# Altium PCB PCB1_1.PcbDoc
Units mil, origin at the board's own origin, x right, y up, seen from the top; angles counter-clockwise.
Board outline 6000 x 4000 mil, 2 copper layers (Top Layer, Bottom Layer); 23 components, 40 nets, 148 pads, 0 vias.
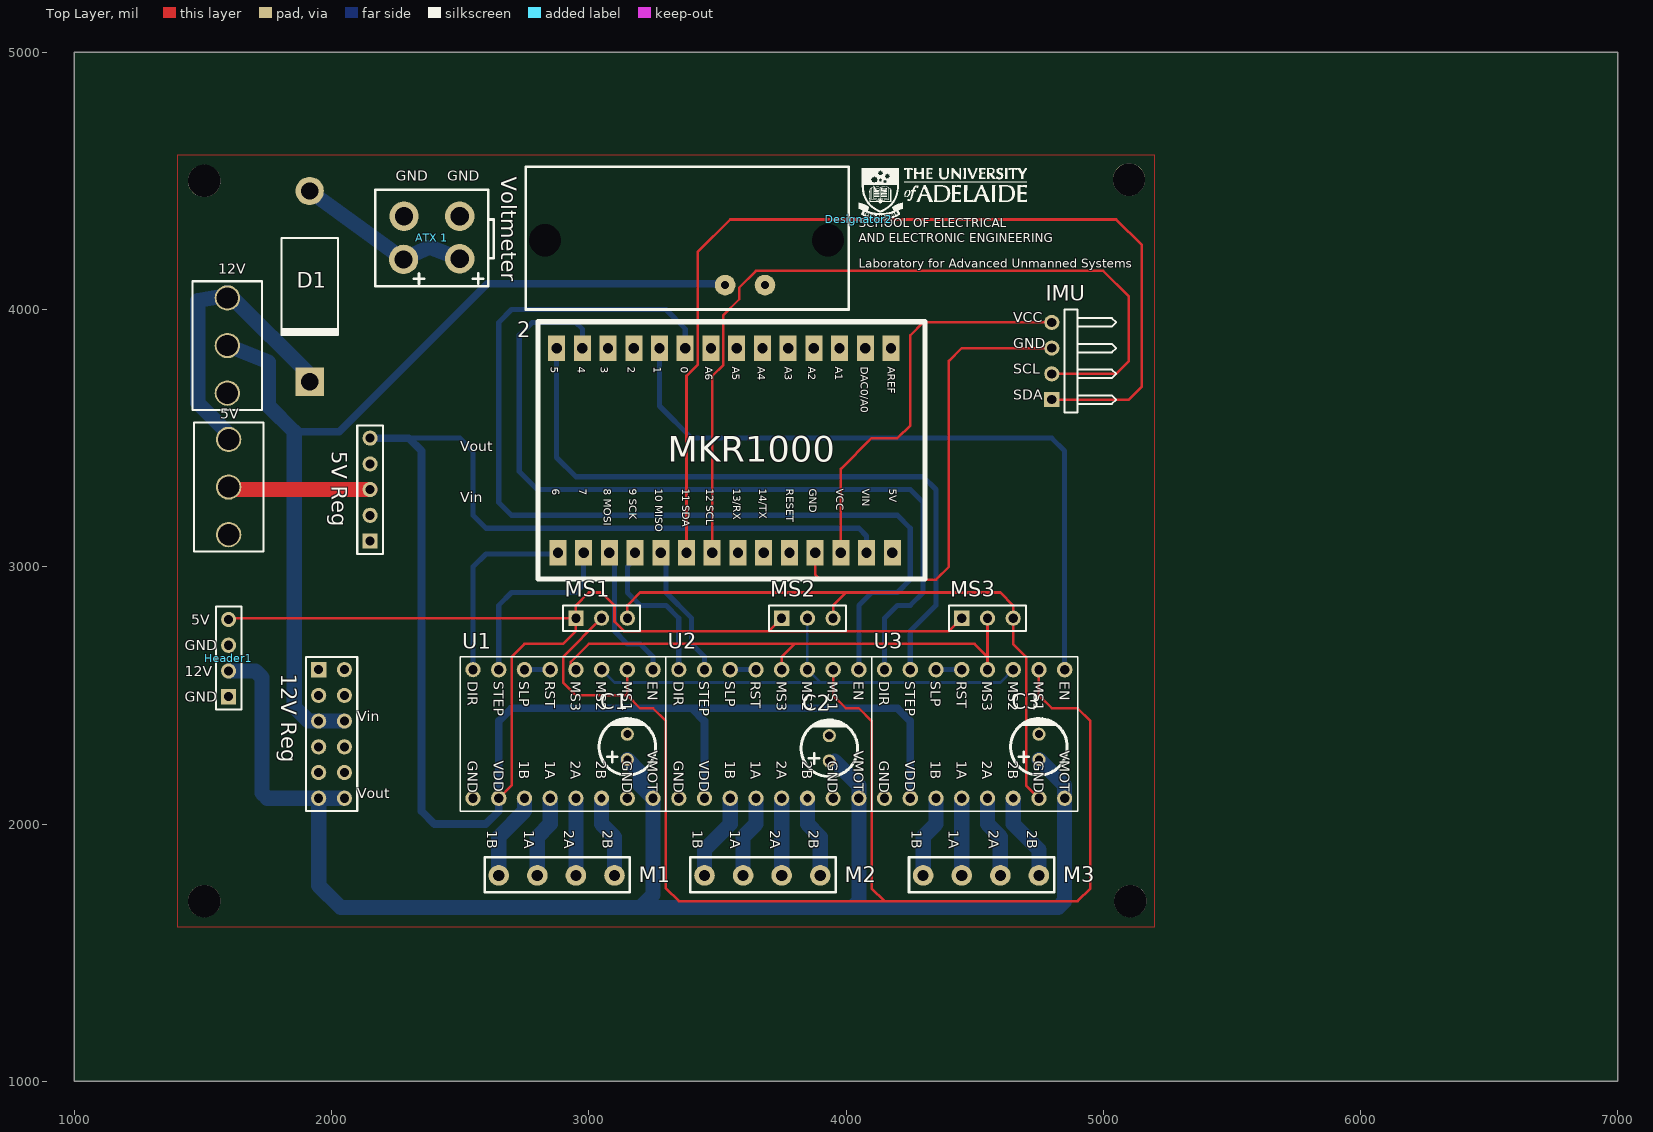
[diagram p0: Top Layer view]
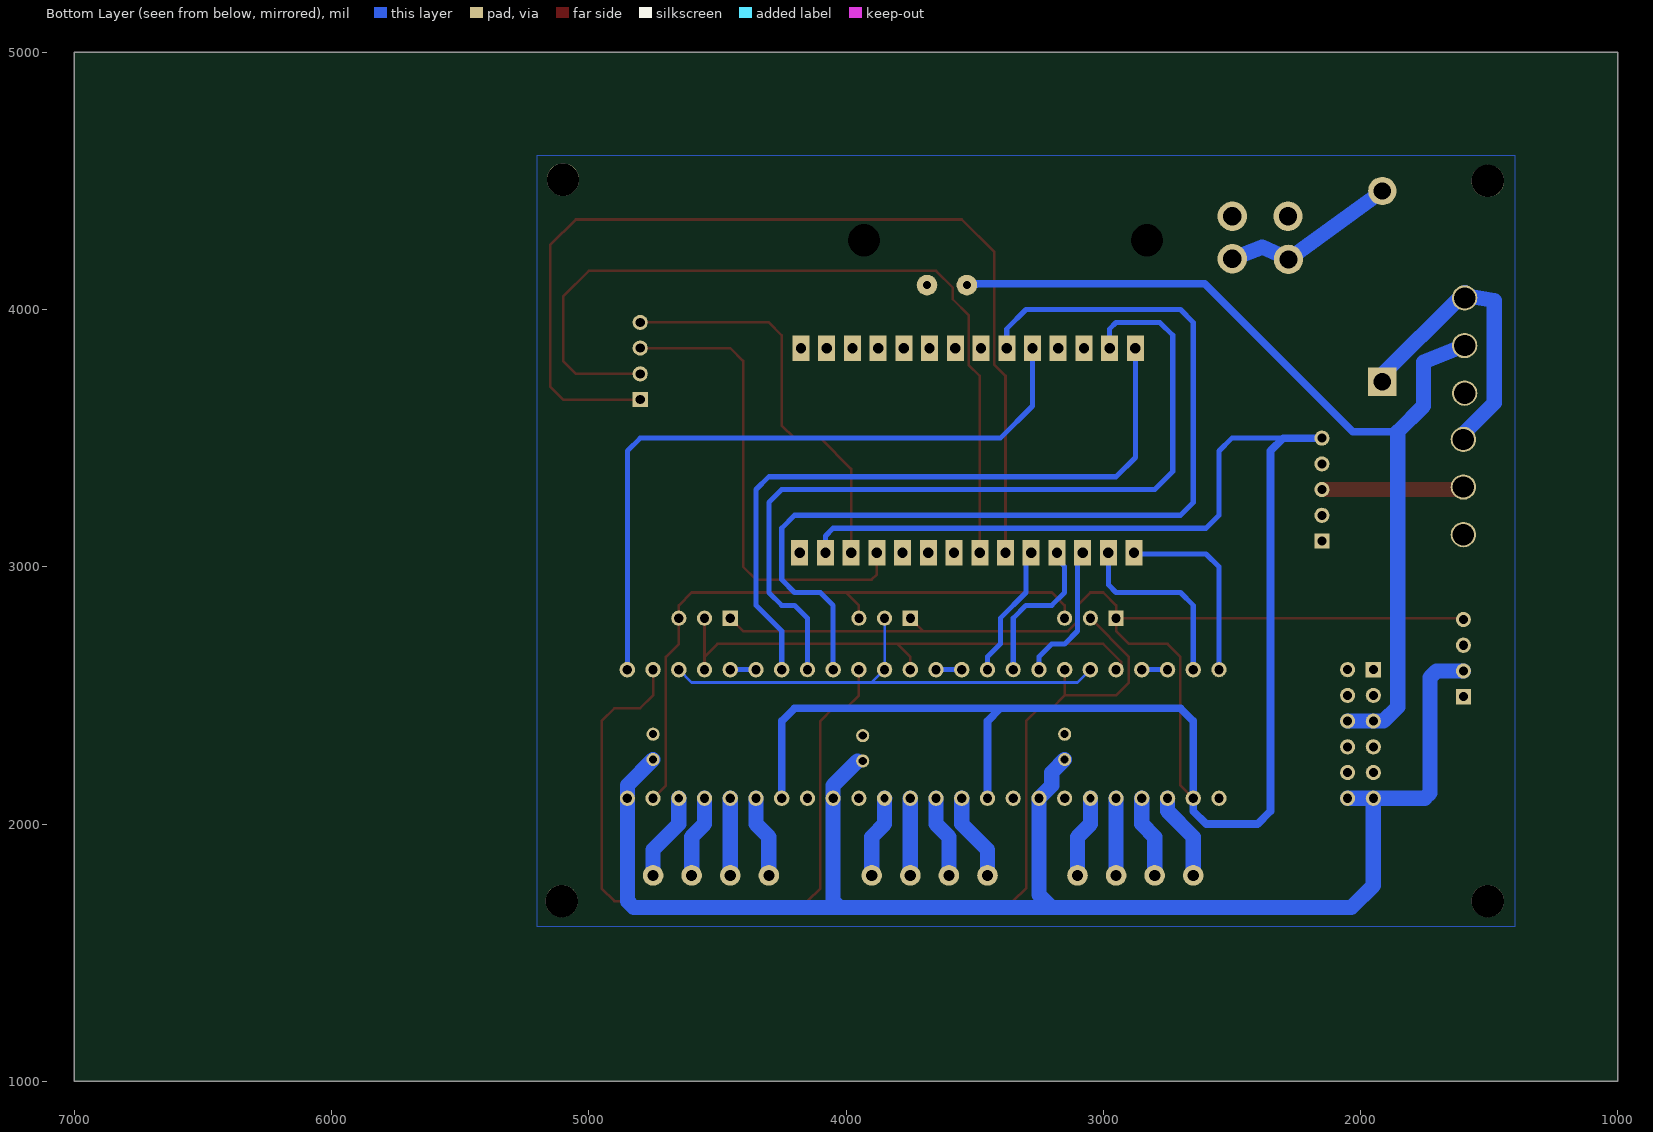
[diagram p1: Bottom Layer view, seen from below]

## Layer stack, top to bottom
Top Solder: solder mask 0.4, Solder Resist, Dk 3.5
Top Layer: signal copper 1.4
Dielectric 1: dielectric 12.6, FR-4, Dk 4.8
Bottom Layer: signal copper 1.4
Bottom Solder: solder mask 0.4, Solder Resist, Dk 3.5

## Board outline
1000,1000 7000,1000 7000,5000 1000,5000

## Design rules (kind name [scope] priority, off if disabled: settings)
Clearance [All] p1: gap=10 ignorepadtopadclearanceinfootprint=FALSE except(0: Arc-Hole Track-Hole SMDPad-Hole THPad-Hole Via-Hole Fill-Hole Poly-Hole Region-Hole Text-Hole)
PolygonConnect [All] p1: connectstyle=Relief reliefconductorwidth=10 reliefentries=4 polygonreliefangle="90 Angle" airgapwidth=10
RoomDefinition Sheet1 [InComponentClass('Sheet1')] p1: confinementstyle=ConfineIn formatcopy=TRUE lockcomponents=FALSE outline 0,0 2000,0 2000,1000 0,1000
RoutingVias [All] p1: holewidth=28 width=50 viastyle="Through Hole" minholewidth=28 minwidth=50 maxholewidth=28 maxwidth=50
SolderMaskExpansion [All] p1: expansion=4
Width [All] p1: maxlimit=10 minlimit=10 preferedwidth=10
30 further rules are at their usual default settings.

## Classes and differential pairs
component class Sheet1: 2 5V "5V Reg" 12V "12V Reg" "ATX 1" C1 C2 C3 Header1

## Components (designator, comment, footprint, x,y, rotation, side; value= is the part's Value field where it differs from the comment)
2 "MKR 1000" MKR1000 3527.5,3452.5 r270 top
5V "SW-SPDT" SPDT 1464.96,3559.96 r270 top
"5V Reg" "Header 5" HDR1X5 2150,3100 r90 top (schematic designator 1)
12V "SW-SPDT" SPDT 1459.96,4109.96 r270 top
"12V Reg" "Header 6X2" HDR2X6 1950,2600 r270 top (schematic designator 3)
"ATX 1" "ATX 4" ATX4 2390,4280 r0 top
C1 "C43803" C43803 3150,2300 r90 top value=100uF (schematic designator C2)
C2 "C43803" C43803 3935,2294.21 r90 top value=100uF (schematic designator C1)
C3 "C43803" C43803 4750,2300 r90 top value=100uF
D1 "Comment" DO-201AD 1915,4090 r270 top
Designator2 "Comment" ? 4050,4350 r0 top
Header1 "Header 4" HDR1X4 1600,2495 r90 top
IMU "Comment" HDR1X4H 4800,3650 r90 top
M1 "Header 1 x 4" "Female Header for driver" 2835,1805 r0 top (schematic designator P3)
M2 "Header 1 x 4" "Female Header for driver" 3635,1805 r0 top (schematic designator P3)
M3 "Header 1 x 4" "Female Header for driver" 4485,1805 r0 top (schematic designator P3)
MS1 "Comment" HDR1X3 2950,2800 r0 top
MS2 "Comment" HDR1X3 3750,2800 r0 top
MS3 "Comment" HDR1X3 4450,2800 r0 top
U1 "A4988" "A4988 Driver" 2900,2350 r270 top (schematic designator U2)
U2 "A4988" "A4988 Driver" 3700,2350 r270 top
U3 "A4988" "A4988 Driver" 4500,2350 r270 top
Voltmeter "Comment" Voltmeter 3360,4265 r0 top

## Footprints (in the part's own frame and the unit in brackets; to place one, negate y for a bottom-side part, rotate by r counter-clockwise, add the part's x,y. Pads: shape width x height; smd on the part's side, far side on the other; paste and mask are expansions set on the pad)
"A4988 Driver" [mil]
  round 60 hole 36: 1(-250,350) 2(-250,250) 3(-250,150) 4(-250,50) 5(-250,-50) 6(-250,-150) 7(-250,-250) 10(250,-250) 11(250,-150)
  round 59.05 hole 36: 8(-250,-350) 9(250,-350) 12(250,-50) 13(250,50) 15(250,250) 16(250,350)
  round 59.05 hole 31.5: 14(250,150)
  silkscreen extent -300,-400 300,400
ATX4 [mil]
  round 114.21 hole 70.79: 1(-110,-85) 2(-108.25,82.7) 3(108.25,-82.7) 4(108.25,82.7)
  silkscreen extent -220,-190 240,185
C43803 [mm]
  round 1.3 hole 0.8: 1(-1.25,0) 2(1.25,0)
  silkscreen extent -2.79,-2.79 2.79,2.79
DO-201AD [mm] "Diode, Axial; Body 9.5 x 5.6 mm (LxDia. max), Lead Dia. 1.32 mm (max)"
  round 2.8 hole 1.7: 1(-9.42,0)
  rect 2.8x2.8 hole 1.7: 2(9.42,0)
  silkscreen extent -4.8,-2.8 4.9,2.8
"Female Header for driver" [mil] "EC381V"
  round 80 hole 43.31: 1(-185,-5) 2(-35,-5) 3(115,-5) 4(265,-5)
  silkscreen extent -240,-70 325,65
HDR1X3 [mm] "Connector; Header; 3 Position"
  rect 1.5x1.5 hole 0.9: 1(0,0)
  round 1.5 hole 0.9: 2(2.54,0) 3(5.08,0)
  silkscreen extent -1.27,-1.27 6.35,1.27
HDR1X4 [mm] "Connector; Header; 4 Position"
  rect 1.5x1.5 hole 0.9: 1(0,0)
  round 1.5 hole 0.9: 2(2.54,0) 3(5.08,0) 4(7.62,0)
  silkscreen extent -1.27,-1.27 8.89,1.27
HDR1X4H [mm] "Connector; Header; 4 Position; Right Angle"
  rect 1.5x1.5 hole 0.9: 1(0,0)
  round 1.5 hole 0.9: 2(2.54,0) 3(5.08,0) 4(7.62,0)
  silkscreen extent -1.27,-6.35 8.89,-1.27
HDR1X5 [mm] "Connector; Header; 5 Position"
  rect 1.5x1.5 hole 0.9: 1(0,0)
  round 1.5 hole 0.9: 2(2.54,0) 3(5.08,0) 4(7.62,0) 5(10.16,0)
  silkscreen extent -1.27,-1.27 11.43,1.27
HDR2X6 [mm] "Connector; Header; 6x2 Position"
  rect 1.5x1.5 hole 0.9: 1(0,0)
  round 1.5 hole 0.9: 2(0,2.54) 3(2.54,0) 4(2.54,2.54) 5(5.08,0) 6(5.08,2.54) 7(7.62,0) 8(7.62,2.54) 9(10.16,0) 10(10.16,2.54) 11(12.7,0) 12(12.7,2.54)
  silkscreen extent -1.27,-1.27 13.97,3.81
MKR1000 [mil]
  rect 100x66 hole 40: 1(-397.5,647.5) 2(-397.5,547.5) 3(-397.5,447.5) 4(-397.5,347.5) 5(-397.5,247.5) 6(-397.5,147.5) 7(-397.5,47.5) 8(-397.5,-52.5) 9(-397.5,-152.5) 10(-397.5,-252.5) 11(-397.5,-352.5) 12(-397.5,-452.5) 13(-397.5,-552.5) 14(-397.5,-652.5) 15(397.5,-647.5) 16(397.5,-547.5) 17(397.5,-447.5) 18(397.5,-347.5) 19(397.5,-247.5) 20(397.5,-147.5) 21(397.5,-47.5) 22(397.5,52.5) 23(397.5,152.5) 24(397.5,252.5) 25(397.5,352.5) 26(397.5,452.5) 27(397.5,552.5) 28(397.5,652.5)
  silkscreen extent -500,-725 500,780
SPDT [mm]
  round 2.5 hole 2.1: 1(11.05,3.43) 2(6.35,3.43) 3(1.65,3.43)
  silkscreen extent 0,0 12.7,6.86
Voltmeter [mil]
  round 106.3 hole 125.98: 2(-530,5) 2(570,5)
  round 80 hole 31.5: V1(325,-170) V2(170,-170)
  silkscreen extent -605,-265 650,290
? [mil]
  silkscreen extent 0,0 653,200

## Part data
2: library part "Arduino MKR 1000", "Arduino wifi"
5V 12V: "SPDT Subminiature Toggle Switch, Right Angle Mounting, Vertical Actuation", ComponentLink1Description="Manufacturer Link", ComponentLink1URL=http://www.apem.com, DatasheetVersion=05-Dec-2000, LatestRevisionDate=17-Dec-2003, LatestRevisionNote="Schematic revised, PCB Footprint replaced.", PackageDescription="Switch; 4 Leads", PackageReference=TL36WW15050, Published=24-Mar-1999, Publisher="Altium Limited"
"5V Reg": "Header, 5-Pin", LatestRevisionDate=17-Jul-2002, LatestRevisionNote="Re-released for DXP Platform.", Publisher="Altium Limited"
"12V Reg": "Header, 6-Pin, Dual row", LatestRevisionDate=17-Jul-2002, LatestRevisionNote="Re-released for DXP Platform.", Publisher="Altium Limited"
"ATX 1": "ATX 4Pins power connector"
C1 C2 C3: "Polarized Capacitor C43803 100uF", LatestRevisionDate=29-May-2009, LatestRevisionNote="IPC-7351 Footprint Added.", PackageDescription="Chip Capacitor", PackageReference=C0805, Published=8-Jun-2000, Publisher="Altium Limited"
Header1 M1 M2 M3: "Header, 4-Pin", LatestRevisionDate=17-Jul-2002, LatestRevisionNote="Re-released for DXP Platform.", Publisher="Altium Limited"
U1 U2 U3: library part "A4988 Driver", "Motor Driver"

## Free pads (board coordinates)
  round 126 hole 126 unplated: 1(1505,1700) 2(1505,4500) 3(5100,4505) 3(5105,1700)

## Nets (pads, with @x,y where several pads share a name; then routed paths per layer and width w, separated by ;. In a path a pad name is that pad's centre, name@x,y a point inside that pad or via, vN(x,y) a via of type N, cw(c..) or ccw(c..) an arc to the next point about the centre after c; other vN are vias at no path point)
GND: 2.25 "5V Reg.4" "12V Reg.7" "12V Reg.8" "12V Reg.9" "12V Reg.10" "ATX 1.2" "ATX 1.4" C1.2 C2.2 C3.2 Header1.1 Header1.3 IMU.3 MS1.3 MS2.3 MS3.3 U1.9 U1.15 U2.9 U2.15 U3.9 U3.15 Voltmeter.V1 | length 4372.4
  Top Layer w10: MS1.3 3150,2850 3200,2900 4000,2900 ; 2.25@3890,3065 2.25 3880,2970 3900,2950 4350,2950 4400,3000 4400,3800 4450,3850 IMU.3 ; MS2.3 3950,2850 4000,2900 ; U3.15 4700,2150 4700,2650 4650,2700 MS3.3 4650,2850 4600,2900 4000,2900
NET1_1: 2.14 U3.7 | length 2693.2
  Bottom Layer w20: 2.14 2875,3425 2950,3350 4300,3350 4350,3300 4350,2850 4250,2750 U3.7
Net1_3: 5V.2 "5V Reg.3" | length 561.2
  Top Layer w10: 5V.2 5V.2@1609.96,3300
  Top Layer w59.06: 5V.2@1609.96,3300 2150,3300
  Bottom Layer w20: 5V.2@1590,3310 5V.2@1595,3315
Net1_5: 2.27 "5V Reg.5" Header1.4 MS1.1 MS2.1 MS3.1 U1.10 U2.10 U3.10 | length 10803.5
  Top Layer w10: Header1.4 1605,2800 MS1.1 ; U1.10 2700,2150 2700,2650 2750,2700 2900,2700 2950,2750 MS1.1 ; MS2.1 3700,2750 ; MS3.1 4400,2750 3700,2750 ; MS1.1 2950,2850 3000,2900 3050,2900 3100,2850 3100,2787.03 3137.03,2750 3700,2750
  Bottom Layer w20: 2300,3500 2500,3500 2550,3450 2550,3200 2600,3150 4050,3150 4080,3120 2.27
  Bottom Layer w30: 2150,3500 2300,3500 2350,3450 2350,2050 2400,2000 2600,2000 2650,2050 U1.10 2650,2400 2700,2450 3400,2450 ; U2.10 3450,2400 3400,2450 ; 2.27@4080,3050 2.27 ; U3.10 4250,2400 4200,2450 3400,2450
Net2_9: 2.9 U2.1 | length 3884.6
  Bottom Layer w20: 2.9 3375,3925 3300,4000 2700,4000 2650,3950 2650,3250 2700,3200 4200,3200 4250,3150 4250,2950 4200,2900 4100,2900 4050,2850 U2.1
Net2_10: 2.10 U3.1 | length 2722.5
  Bottom Layer w20: 2.10 3275,3625 3400,3500 4800,3500 4850,3450 U3.1
Net2_13: 2.13 U3.8 | length 3242.2
  Bottom Layer w20: 2.13 2975,3925 2950,3950 2780,3950 2730,3900 2730,3370 2800,3300 4250,3300 4300,3250 4300,2900 4250,2850 4200,2850 4150,2800 U3.8
Net2_14: U2.5 U2.6 | length 100
  Bottom Layer w20: U2.6 U2.5
Net2_15: 2.15 U1.8 | length 750.7
  Bottom Layer w20: U1.8 2550,3000 2600,3050 2.15@2880,3050
Net2_16: 2.16 U1.7 | length 738.1
  Bottom Layer w20: U1.7 2650,2850 2700,2900 2950,2900 2980,2930 2.16
Net2_17: 2.17 U1.1 | length 554.7
  Bottom Layer w10: 2.17 2.17@3100,3035
  Bottom Layer w20: 2.17@3100,3035 3100,2750 3150,2700 3200,2700 3250,2650 U1.1
Net2_18: 2.18 U2.8 | length 608.8
  Bottom Layer w10: 2.18@3180,3030 2.18
  Bottom Layer w20: 2.18@3180,3030 3150,3000 3150,2900 3200,2850 3300,2850 3350,2800 U2.8
Net2_19: 2.19 U2.7 | length 525.4
  Bottom Layer w10: 2.19 2.19@3300,3035
  Bottom Layer w20: 2.19@3300,3035 3300,2900 3400,2800 3400,2700 3450,2650 U2.7
Net2_22: MS1.2 U1.2 U2.2 U3.2 | length 5219.2
  Top Layer w10: MS1.2 2900,2650 2900,2550 2950,2500 3150,2500 ; U1.2 3150,2500 ; U2.2 3950,2500 4000,2450 4050,2450 4100,2400 4100,1750 4150,1700 ; U3.2 4750,2500 4800,2450 4900,2450 4950,2400 4950,1750 4900,1700 4150,1700 ; 3150,2500 3200,2450 3250,2450 3300,2400 3300,1750 3350,1700 4150,1700
Net3_5: 
Net3_11: "12V Reg.11" "12V Reg.12" C1.1 C2.1 C3.1 Header1.2 U1.16 U2.16 U3.16 | length 6073.5
  Bottom Layer w10: C2.1 C2.1@3955,2245
  Bottom Layer w59.05: Header1.2 1705,2595 1730,2570 1730,2120 1750,2100 1950,2100 ; 2036,1675 1950,1761 1950,2100 ; 2050,2100 1950,2100 ; C1.1 3200,2200.79 3200,2150 U1.16 3250,1725 3200,1675 ; 3250,1675 4025,1675 ; C2.1@3955,2245 4050,2150 U2.16 4050,1700 4025,1675 ; C3.1 4850,2150.79 U3.16 4850,1700 4825,1675 4025,1675
  Bottom Layer w59.06: 2036,1675 3200,1675 3250,1675
Net5V_2: 
Net5V_3: 5V.3 12V.3 D1.2 | length 1191.6
  Bottom Layer w59.06: 5V.3@1598,3519 1480,3637 1480,4035 1593.41,4054.33 12V.3@1594.6,4054.53 ; D1.2@1920,3729.13 1920,3741.74 1766.81,3894.93 1765.07,3894.93 1594.13,4065.87 12V.3@1594.6,4054.53 ; 12V.3@1594.6,4054.53 1590.59,4047.53 1589.13,4045 12V.3 12V.3@1594.6,4054.53
"NetATX 1_1": "ATX 1.1" "ATX 1.3" D1.1 | length 688.8
  Bottom Layer w59.06: D1.1 2280,4195 ; 2279.02,4196.77 2279.19,4196.84 2382.52,4242.31 2498.25,4197.3
NetHeader1_4: 12V.2 "12V Reg.5" "12V Reg.6" Voltmeter.V2 | length 3685.7
  Bottom Layer w30: 1855,3525 2030,3525 2605,4100 Voltmeter.V2@3530,4100
  Bottom Layer w59.05: 1855,2600 1855,2455 1910,2400 1950,2400 2050,2400
  Bottom Layer w59.06: 12V.2 1755,3796 1755,3625 1855,3525 1855,2600
NetM1_1: M2.1 U2.11 | length 341.4
  Bottom Layer w59.05: M2.1 3450,1900 3550,2000 U2.11
NetM1_2: M2.2 U2.12 | length 320.7
  Bottom Layer w59.05: M2.2 3600,1950 3650,2000 U2.12
NetM1_3: M2.3 U2.13 | length 300
  Bottom Layer w59.05: M2.3 U2.13
NetM1_4: M2.4 U2.14 | length 320.7
  Bottom Layer w59.05: U2.14 3850,2000 3900,1950 M2.4
NetM2_1: M1.1 U1.11 | length 341.4
  Bottom Layer w59.05: M1.1 2650,1950 2750,2050 U1.11
NetM2_2: M1.2 U1.12 | length 320.7
  Bottom Layer w59.05: M1.2 2800,1950 2850,2000 U1.12
NetM2_3: M1.3 U1.13 | length 300
  Bottom Layer w59.05: M1.3 U1.13
NetM2_4: M1.4 U1.14 | length 320.7
  Bottom Layer w59.05: U1.14 3050,2000 3100,1950 M1.4
NetM3_1: M3.1 U3.11 | length 320.7
  Bottom Layer w59.05: M3.1 4300,1950 4350,2000 U3.11
NetM3_2: M3.2 U3.12 | length 300
  Bottom Layer w59.05: M3.2 U3.12
NetM3_3: M3.3 U3.13 | length 320.7
  Bottom Layer w59.05: U3.13 4550,2000 4600,1950 M3.3
NetM3_4: M3.4 U3.14 | length 341.4
  Bottom Layer w59.05: U3.14 4650,2000 4750,1900 M3.4
NetU2_3: MS2.2 U1.3 U2.3 U3.3 | length 1912.1
  Bottom Layer w10: U1.3 3100,2550 3900,2550 ; MS2.2 U2.3 3900,2550 ; U3.3 4600,2550 3900,2550
NetU2_4: MS3.2 U1.4 U2.4 U3.4 | length 2040.4
  Top Layer w10: U1.4@2935.86,2585.86 2930,2585.86 2930,2630 3000,2700 3800,2700 ; U2.4 3750,2650 3800,2700 ; U3.4 4550,2650 ; MS3.2 4550,2650 ; 3800,2700 4500,2700 4550,2650
NetU2_5: 
NetU2_5: U1.5 U1.6 | length 100
  Bottom Layer w20: U1.6 U1.5
NetU3_5: U3.5 U3.6 | length 100
  Bottom Layer w20: U3.6 U3.5
SCL: 2.21 IMU.2 | length 3227.5
  Top Layer w10: 2.21 3480,3742 3523,3785 3523,3978 3585,4040 3585,4085 3650,4150 5000,4150 5100,4050 5100,3800 5050,3750 IMU.2
SDA: 2.20 IMU.1 | length 3927.5
  Top Layer w10: 2.20 3380,3742 3423,3785 3423,4223 3550,4350 5050,4350 5150,4250 5150,3700 5100,3650 IMU.1
VCC: 2.26 IMU.4 | length 1586.1
  Top Layer w10: 2.26 3980,3380 4100,3500 4200,3500 4250,3550 4250,3900 4300,3950 IMU.4
pads on no net: 2.1 2.2 2.3 2.4 2.5 2.6 2.7 2.8 2.11 2.12 2.22 2.23 2.24 2.28 5V.1 12V.1 "5V Reg.1" "5V Reg.2" "12V Reg.1" "12V Reg.2" "12V Reg.3" "12V Reg.4" Voltmeter.2
copper on no net: | length 71
  Top Layer w10: 2750,2625 2755,2625 ; 2950,2600 2955,2605 ; 4055,3055 4080,3055
  Bottom Layer w10: 2381.75,4228.64 2385,4225.39
  Bottom Layer w20: 2975,3045 2980,3050 ; 2975,3845 2980,3850 ; 3375,3845 3380,3850 ; 3491.47,4094.14 3491.47,4100 ; 3830,2100 3831.58,2098.42

## Polygon pours and split planes (outlines as drawn)
GND on Bottom Layer "NONET_L02_P000" (solid, remove dead copper, shelved, pour order 0): 1400,4600 1400,1600 5200,1600 5200,4600
GND on Top Layer "NONET_L01_P002" (solid, remove dead copper, shelved, pour order 2): 1400,4600 1400,1600 5200,1600 5200,4600
no net on Drill Drawing "NONET_L-01_P-001" (solid, remove dead copper, shelved): 1400,4600 1400,1600 5200,1600 5200,4600

## Silkscreen, mask and mechanical layers (free items; w line width, h text height)
Top Overlay:
  text "GND" at 2250,4500 h39.37
  text "GND" at 2450,4500 h39.37
  text "SCHOOL OF ELECTRICAL / AND ELECTRONIC ENGINEERING" at 4050,4250 h59.06
  text "Laboratory for Advanced Unmanned Systems" at 4050,4150 h59.06
  text "VCC" at 4650,3950 h39.37
  text "GND" at 4650,3850 h39.37
  text "SCL" at 4650,3750 h39.37
  text "SDA" at 4650,3650 h39.37
  text "Vout" at 2500,3450 h39.37
  text "Vin" at 2500,3250 h39.37
  text "5V" at 1455,2775 h39.37
  text "GND" at 1430,2675 h39.37
  text "12V" at 1430,2575 h39.37
  text "GND" at 1430,2475 h39.37
  text "Vin" at 2100,2400 h39.37
  text "Vout" at 2100,2100 h39.37
  text "1B" at 2605,1975 h39.37 r270
  text "1A" at 2750,1975 h39.37 r270
  text "2A" at 2905,1975 h39.37 r270
  text "2B" at 3055,1975 h39.37 r270
  text "1B" at 3405,1975 h39.37 r270
  text "1A" at 3550,1975 h39.37 r270
  text "2A" at 3705,1975 h39.37 r270
  text "2B" at 3855,1975 h39.37 r270
  text "1B" at 4255,1975 h39.37 r270
  text "1A" at 4400,1975 h39.37 r270
  text "2A" at 4555,1975 h39.37 r270
  text "2B" at 4705,1975 h39.37 r270
  text "Laboratory for Advanced Unmanned Systems" at 6775,225 h59.06
  text "Laboratory for Advanced Unmanned Systems" at 8225,-225 h59.06
Mechanical 1:
  lines w10: 1405,1600 1405,4600 5205,4600 5205,3850 5205,2350 5205,1600 1405,1600

## Text inside footprints (layer, text, board x,y; h text height)
2: Top Overlay "MKR1000" at 3307.5,3407.5 h100; Top Overlay "AREF" at 4162.5,3777.5 h30 r270; Top Overlay "DAC0/A0" at 4057.5,3777.5 h30 r270; Top Overlay "A2" at 3852.5,3777.5 h30 r270; Top Overlay "A1" at 3957.5,3777.5 h30 r270; Top Overlay "A5" at 3557.5,3777.5 h30 r270; Top Overlay "A6" at 3452.5,3777.5 h30 r270; Top Overlay "A4" at 3657.5,3777.5 h30 r270; Top Overlay "A3" at 3762.5,3777.5 h30 r270; Top Overlay "4" at 2957.5,3777.5 h30 r270; Top Overlay "5" at 2852.5,3777.5 h30 r270; Top Overlay "3" at 3047.5,3777.5 h30 r270; Top Overlay "1" at 3252.5,3777.5 h30 r270; Top Overlay "0" at 3357.5,3777.5 h30 r270; Top Overlay "11 SDA" at 3362.5,3302.5 h30 r270; Top Overlay "10 MISO" at 3257.5,3302.5 h30 r270; Top Overlay "8 MOSI" at 3057.5,3302.5 h30 r270; Top Overlay "9 SCK" at 3157.5,3302.5 h30 r270; Top Overlay "6" at 2857.5,3302.5 h30 r270; Top Overlay "7" at 2962.5,3302.5 h30 r270; Top Overlay "RESET" at 3767.5,3302.5 h30 r270; Top Overlay "14/TX" at 3662.5,3302.5 h30 r270; Top Overlay "12 SCL" at 3457.5,3302.5 h30 r270; Top Overlay "13/RX" at 3562.5,3302.5 h30 r270; Top Overlay "VCC" at 3962.5,3302.5 h30 r270; Top Overlay "GND" at 3857.5,3302.5 h30 r270; Top Overlay "VIN" at 4062.5,3302.5 h30 r270; Top Overlay "5V" at 4167.5,3302.5 h30 r270
U1: Top Overlay "SLP" at 2730,2555 h40 r270; Top Overlay "RST" at 2830,2555 h40 r270; Top Overlay "EN" at 3230,2555 h40 r270; Top Overlay "VMOT" at 3230,2285 h40 r270; Top Overlay "GND" at 3130,2245 h40 r270; Top Overlay "2B" at 3030,2245 h40 r270; Top Overlay "2A" at 2930,2245 h40 r270; Top Overlay "1A" at 2830,2245 h40 r270; Top Overlay "1B" at 2730,2245 h40 r270; Top Overlay "VDD" at 2630,2245 h40 r270; Top Overlay "GND" at 2530,2245 h40 r270; Top Overlay "DIR" at 2530,2555 h40 r270; Top Overlay "STEP" at 2630,2555 h40 r270; Top Overlay "MS3" at 2930,2555 h40 r270; Top Overlay "MS2" at 3030,2555 h40 r270; Top Overlay "MS1" at 3130,2555 h40 r270
U2: Top Overlay "SLP" at 3530,2555 h40 r270; Top Overlay "RST" at 3630,2555 h40 r270; Top Overlay "EN" at 4030,2555 h40 r270; Top Overlay "VMOT" at 4030,2285 h40 r270; Top Overlay "GND" at 3930,2245 h40 r270; Top Overlay "2B" at 3830,2245 h40 r270; Top Overlay "2A" at 3730,2245 h40 r270; Top Overlay "1A" at 3630,2245 h40 r270; Top Overlay "1B" at 3530,2245 h40 r270; Top Overlay "VDD" at 3430,2245 h40 r270; Top Overlay "GND" at 3330,2245 h40 r270; Top Overlay "DIR" at 3330,2555 h40 r270; Top Overlay "STEP" at 3430,2555 h40 r270; Top Overlay "MS3" at 3730,2555 h40 r270; Top Overlay "MS2" at 3830,2555 h40 r270; Top Overlay "MS1" at 3930,2555 h40 r270
U3: Top Overlay "SLP" at 4330,2555 h40 r270; Top Overlay "RST" at 4430,2555 h40 r270; Top Overlay "EN" at 4830,2555 h40 r270; Top Overlay "VMOT" at 4830,2285 h40 r270; Top Overlay "GND" at 4730,2245 h40 r270; Top Overlay "2B" at 4630,2245 h40 r270; Top Overlay "2A" at 4530,2245 h40 r270; Top Overlay "1A" at 4430,2245 h40 r270; Top Overlay "1B" at 4330,2245 h40 r270; Top Overlay "VDD" at 4230,2245 h40 r270; Top Overlay "GND" at 4130,2245 h40 r270; Top Overlay "DIR" at 4130,2555 h40 r270; Top Overlay "STEP" at 4230,2555 h40 r270; Top Overlay "MS3" at 4530,2555 h40 r270; Top Overlay "MS2" at 4630,2555 h40 r270; Top Overlay "MS1" at 4730,2555 h40 r270